# Altium PCB 1st attempt.PcbDoc
Units mil, origin at the board's own origin, x right, y up, seen from the top; angles counter-clockwise.
Board outline 2615 x 1755 mil, 2 copper layers (Top Layer, Bottom Layer); 48 components, 55 nets, 251 pads, 63 vias.
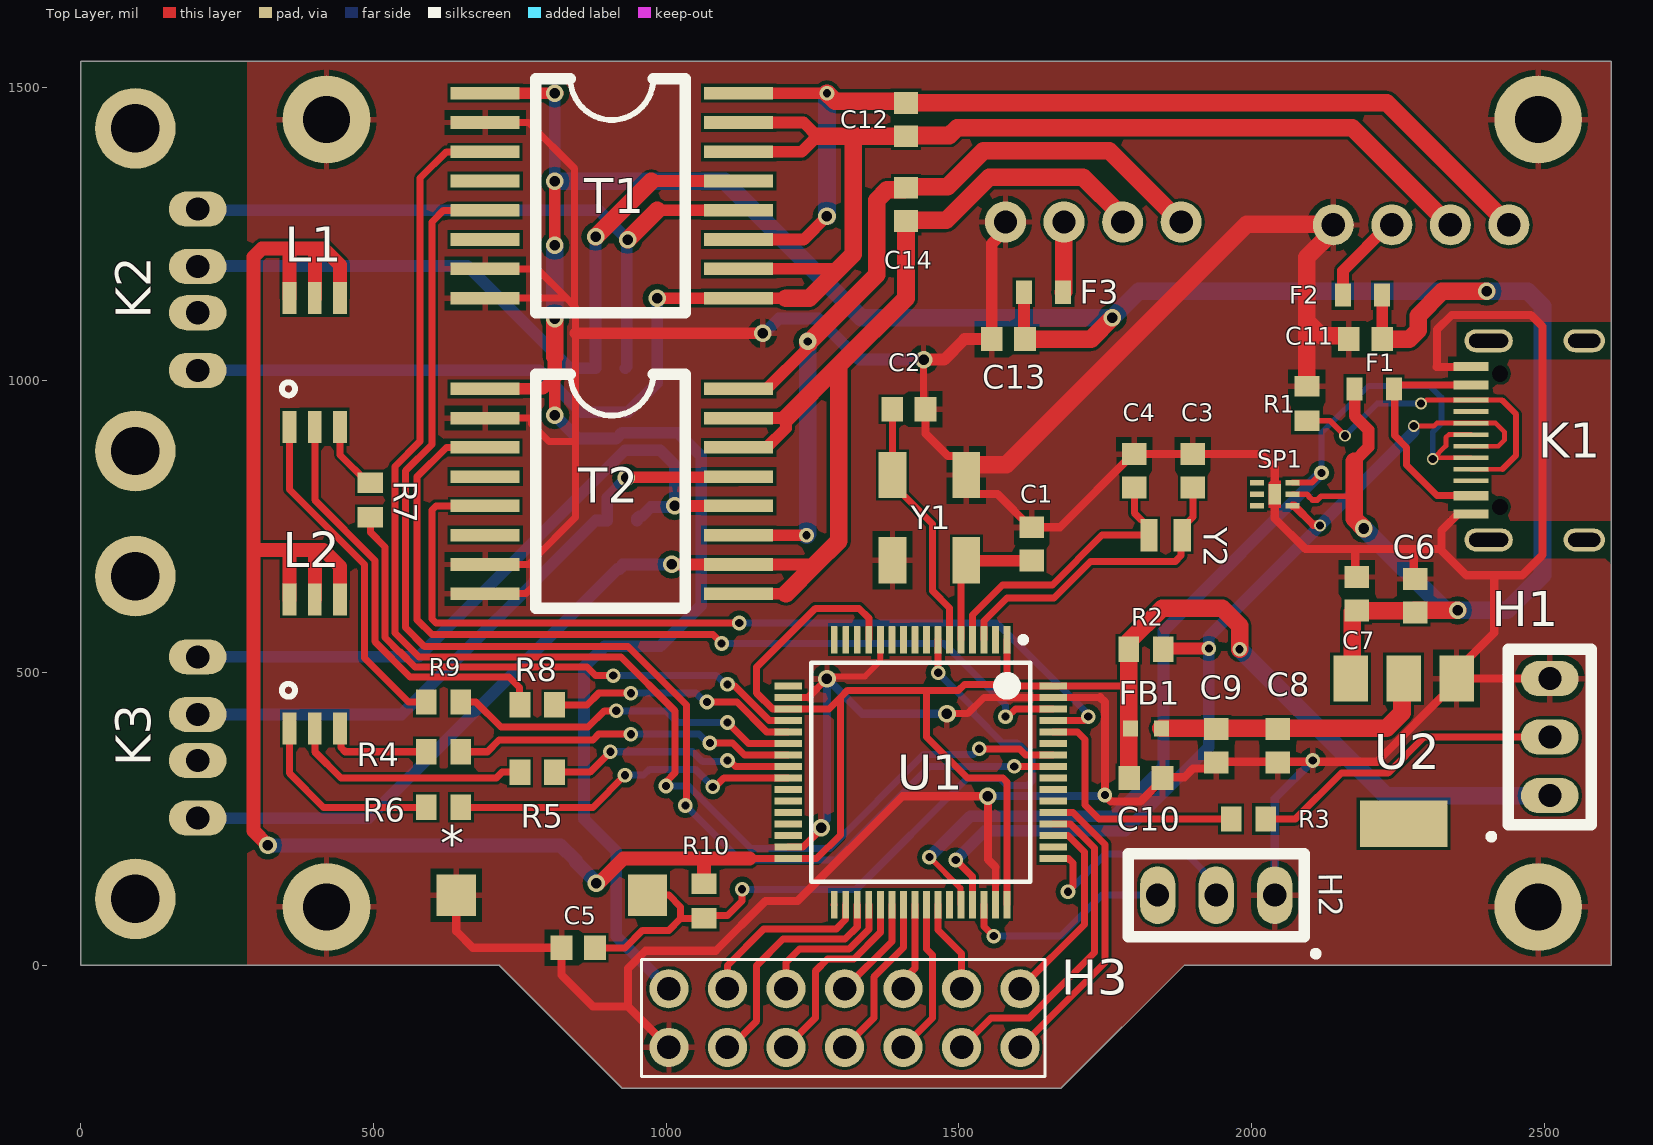
[diagram p0: Top Layer view]
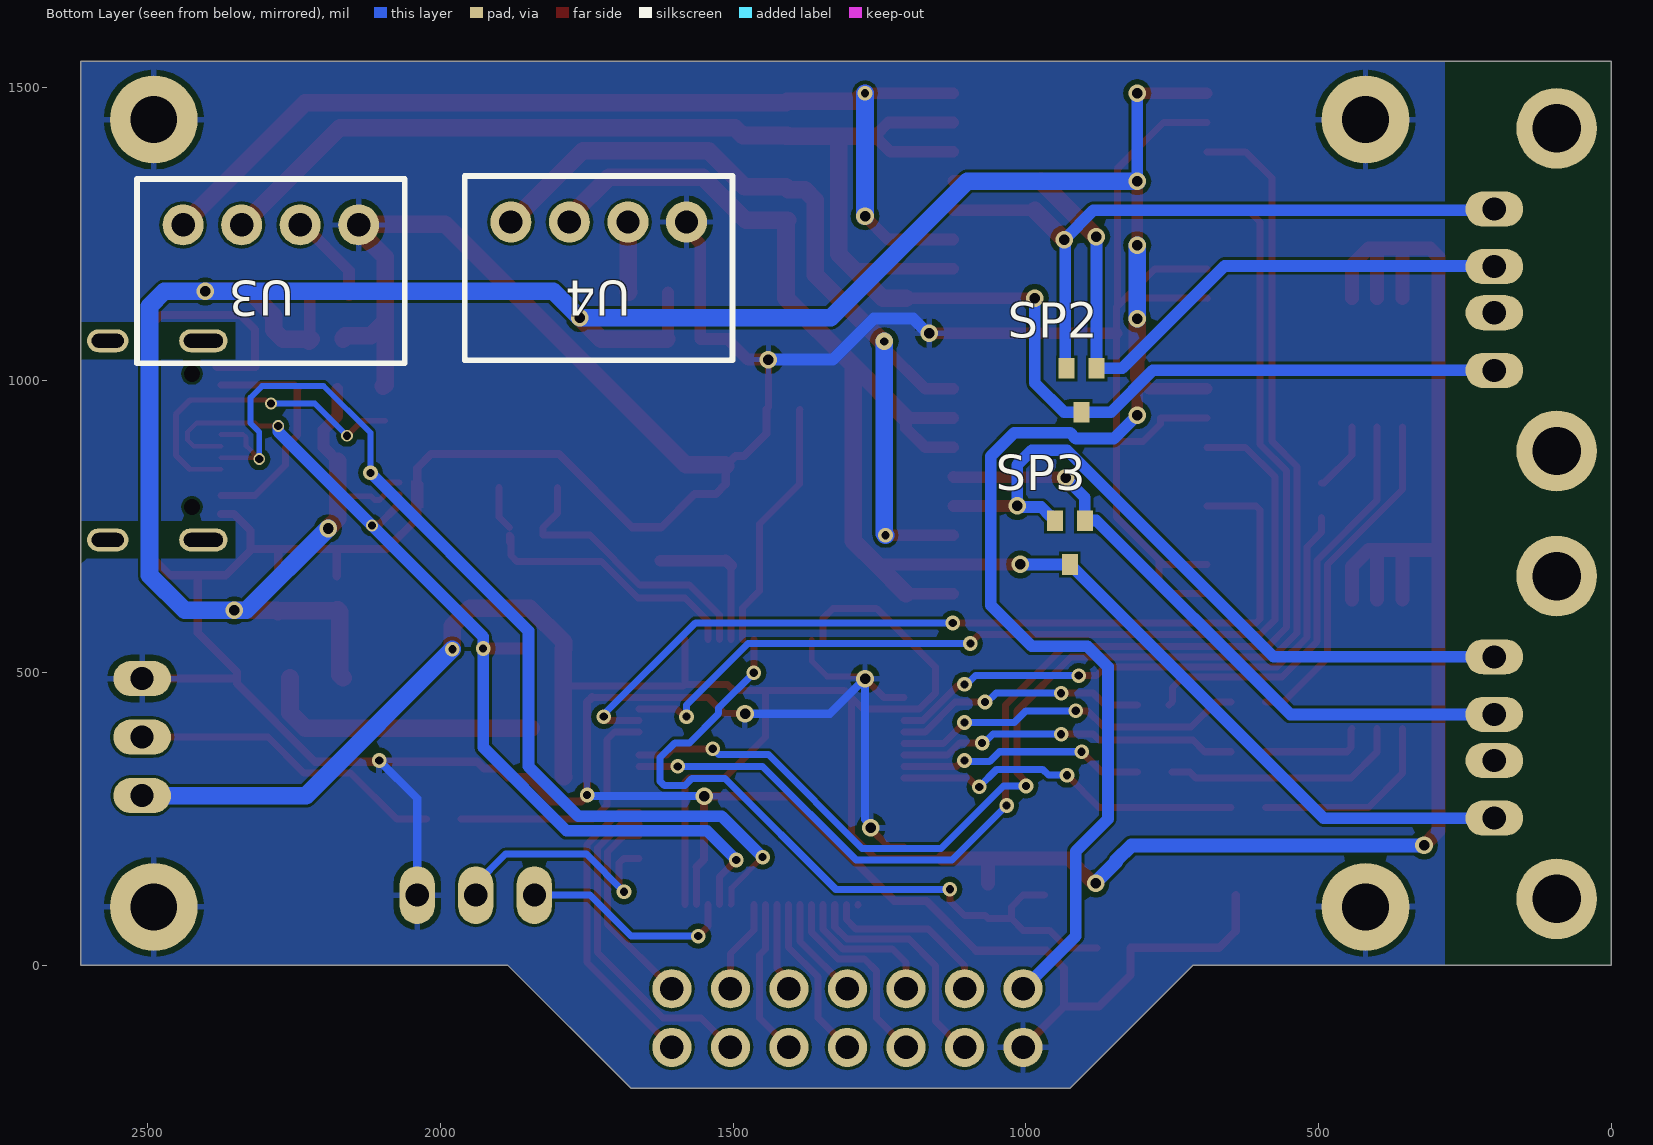
[diagram p1: Bottom Layer view, seen from below]

## Layer stack, top to bottom
Top Solder: solder mask 0.4, Solder Resist, Dk 3.5
Top Layer: signal copper 1.4
Dielectric 1: dielectric 12.6, FR-4, Dk 4.8
Bottom Layer: signal copper 1.4
Bottom Solder: solder mask 0.4, Solder Resist, Dk 3.5

## Board outline
0,0 0,1545 2615,1545 2615,0 1885,0 1675,-210 925,-210 715,0

## Design rules (kind name [scope] priority, off if disabled: settings)
Clearance [All] p1: gap=5 ignorepadtopadclearanceinfootprint=TRUE except(0: Arc-Hole Track-Hole SMDPad-Hole THPad-Hole Via-Hole Fill-Hole Poly-Hole Region-Hole Text-Hole; 9: Arc-Via Arc-Text Track-Via Track-Text SMDPad-Via SMDPad-Text Via-Via Via-Fill Via-Poly Via-Region Via-Text Fill-Fill Fill-Poly Fill-Region Fill-Text Poly-Poly Poly-Region Poly-Text Region-Region Region-Text Text-Text)
PolygonConnect [All] p1: connectstyle=Relief reliefconductorwidth=10 reliefentries=4 polygonreliefangle="90 Angle" airgapwidth=10
RoutingVias [All] p1: holewidth=14 width=30 viastyle="Through Hole" minholewidth=10 minwidth=20 maxholewidth=28 maxwidth=50
SolderMaskExpansion [All] p1: expansion=4 istentingtop=FALSE
Width [All] p1: maxlimit=80 minlimit=6 preferedwidth=12 minimp=50.000000 maximp=50.000000 favimp=50.000000
30 further rules are at their usual default settings.

## Classes and differential pairs
component class "power managment": C6 C7 C8 C9 C10 C11 C12 C13 C14 F1 F2 F3 FB1 K1 R1 R2 SP1 U2 U3 U4
component class MCU: * C1 C2 C3 C4 C5 H1 H2 H3 K2 K3 L1 L2 R3 R4 R5 R6 R7 R8 R9 R10 U1 Y1 Y2
component class "digital logic": SP2 SP3 T1 T2

## Components (designator, comment, footprint, x,y, rotation, side; value= is the part's Value field where it differs from the comment)
* "B1" "Button 3.5x6x4.3mm" 805,120 r270 top
C1 "10pF" CAPC1608X90X35ML10T15 1625,720 r90 top
C2 "10pF" CAPC1608X90X35ML10T15 1415,950 r0 top
C3 "6pF" CAPC1608X90X35ML10T15 1900,845 r270 top
C4 "6pF" CAPC1608X90X35ML10T15 1800,845 r270 top
C5 "100pF" CAPC1608X90X35ML10T15 850,30 r0 top
C6 "10uF" CAPC1608X90X35ML10T15 2280,631.46 r270 top
C7 "100pF" CAPC1608X90X35ML10T15 2180,635 r270 top
C8 "10uF" CAPC1608X90X35ML10T15 2045,375 r90 top
C9 "100pF" CAPC1608X90X35ML10T15 1940,375 r90 top
C10 "100pF" CAPC1608X90X35ML10T15 1820,320 r180 top
C11 "4.7uF" CAPC1608X90X35ML10T15 2195,1070 r180 top
C12 "10uF" CAPC1608X90X35ML10T15 1410,1445 r270 top
C13 "4.7uF" CAPC1608X90X35ML10T15 1585,1070 r180 top
C14 "10uF" CAPC1608X90X35ML10T15 1410,1300 r270 top
F1 "PPTC 0.5A" "PTC 0603" 2210,985 r0 top
F2 "PPTC 0.2A" "PTC 0603" 2190,1145 r180 top
F3 "PPTC 0.2A" "PTC 0603" 1645,1150 r0 top
FB1 "BLM18PG181SN1D" MURA-BLM18PG_KG-CHIP-2_V2 1820,405 r180 top
H1 "Boot0" DIP3 2510,390 r90 top
H2 "SWD" DIP3 1940,120 r180 top
H3 "DIP4*2 Header" DIP7*2 1155,-90 r0 top
K1 "USB C" "USB type C" 2405.31,897 r270 top
K2 "USB A" "USB A" 200,1154.37 r270 top
K3 "USB A" "USB A" 200,389.37 r270 top
L1 "FM-Z3535RGBA-SH" Z3535RGBA 400,1030 r270 top
L2 "FM-Z3535RGBA-SH" Z3535RGBA 400,515 r270 top
R1 "5.1kOm" RESC1608X55X30ML20T10 2095,960 r270 top
R2 "1.5kOm" RESC1608X55X30ML20T10 1820,540 r0 top
R3 "10kOm" RESC1608X55X30ML20T10 1995,250 r0 top
R4 "100Om" RESC1608X55X30ML20T10 620,365 r0 top
R5 "39Om" RESC1608X55X30ML20T10 780,330 r0 top
R6 "62Om" RESC1608X55X30ML20T10 620,270 r0 top
R7 "100Om" RESC1608X55X30ML20T10 495,795 r270 top
R8 "39Om" RESC1608X55X30ML20T10 780,445 r0 top
R9 "62Om" RESC1608X55X30ML20T10 620,450 r0 top
R10 "10kOm" RESC1608X55X30ML20T10 1065,110 r270 top
SP1 "SP3002-04UTG" uDFN-6 2040,805 r0 top
SP2 "SP1001-02JTG" SC70-3 905,1020 r0 bottom
SP3 "SP1001-02JTG" SC70-3 925,759.8 r0 bottom
T1 "TJA1052IT/5Y" TJA1052 905,1315 r0 top
T2 "TJA1052IT/5Y" TJA1052 905,810 r0 top
U1 "STM32F105RBT6" STM-LQFP64_V 1435,330 r270 top
U2 "AMS1117-3.3" AMS1117 2260,490 r180 top
U3 "B0505S-1WR3" "Dip4 package" 2140,1265 r0 bottom
U4 "B0505S-1WR3" "Dip4 package" 1580,1270 r0 bottom
Y1 "8MHz" "SMD-5032 resonator" 1450,765 r90 top
Y2 "32.768KHZ-T" SMD-2012 1853.54,735 r0 top

## Footprints (in the part's own frame and the unit in brackets; to place one, negate y for a bottom-side part, rotate by r counter-clockwise, add the part's x,y. Pads: shape width x height; smd on the part's side, far side on the other; paste and mask are expansions set on the pad)
AMS1117 [mm]
  rect 1.5x2 smd: 1(-2.3,0) 2(0,0) 3(2.3,0)
  rect 3.8x2 smd: ""(0,6.3)
"Button 3.5x6x4.3mm" [mm]
  rect 1.8x1.7 smd: 1(0,-4.15) 2(0,4.15)
CAPC1608X90X35ML10T15 [mm] "Chip Capacitor, 2-Leads, Body 1.60x0.80mm, IPC Low Density"
  rect 0.95x1.05 smd: 1(-0.725,0) 2(0.725,0)
  body extent -0.85,-0.45 0.85,0.45, height 0.9
DIP3 [mm]
  oval 1.524x2.5 hole 1: 1(-2.54,0) 2(0,0) 3(2.54,0)
  silkscreen extent -4.44,-1.8 3.81,2.67
"Dip4 package" [mil]
  round 70 hole 40: 1(0,0) 2(100,0) 3(200,0) 4(300,0)
  silkscreen extent -79,-79 379,236
DIP7*2 [mm]
  round 1.7 hole 1.02: 1(-3.81,1.27) 2(-1.27,1.27) 3(1.27,1.27) 4(3.81,1.27) 5(6.35,1.27) 6(8.89,1.27) 7(11.43,1.27) 8(-3.81,-1.27) 9(-1.27,-1.27) 10(1.27,-1.27) 11(3.81,-1.27) 12(6.35,-1.27) 13(8.89,-1.27) 14(11.43,-1.27)
  silkscreen extent -5,-2.54 12.5,2.54
MURA-BLM18PG_KG-CHIP-2_V2 [mm] "Chip Ferrite Bead, 2-Leads, Body 1.6x0.8mm, Height 0.95mm, Reflow, 0.5 to 1.5A Rated Current"
  rect 0.65x0.7 smd: 1(-0.675,0) 2(0.675,0)
  body extent -0.8,-0.4 0.8,0.4, height 0.95
"PTC 0603" [mm]
  rect 0.7x1 smd: 1(-0.85,0) 2(0.85,0)
RESC1608X55X30ML20T10 [mm] "Chip Resistor, 2-Leads, Body 1.60x0.80mm, IPC Low Density"
  rect 0.9x1.1 smd: 1(-0.75,0) 2(0.75,0)
  body extent -0.9,-0.5 0.9,0.5, height 0.55
SC70-3 [mm]
  rect 0.7x0.9 smd: 1(-0.65,0) 2(0.65,0) 3(0,1.9)
SMD-2012 [mm]
  rect 0.75x1.4 smd: 1(-0.725,0) 2(0.725,0)
"SMD-5032 resonator" [mm]
  rect 2x1.2 smd: 1(1.85,1.6) 2(-1.85,-1.6) GND(-1.85,1.6) GND(1.85,-1.6)
STM-LQFP64_V [mm] "Thin QFP, 64-Leads, Body 10x10mm, Pitch 0.5mm, ST Recommended"
  rect 1.2x0.3 smd: 1(-5.75,3.75) 2(-5.75,3.25) 3(-5.75,2.75) 4(-5.75,2.25) 5(-5.75,1.75) 6(-5.75,1.25) 7(-5.75,0.75) 8(-5.75,0.25) 9(-5.75,-0.25) 10(-5.75,-0.75) 11(-5.75,-1.25) 12(-5.75,-1.75) 13(-5.75,-2.25) 14(-5.75,-2.75) 15(-5.75,-3.25) 16(-5.75,-3.75) 33(5.75,-3.75) 34(5.75,-3.25) 35(5.75,-2.75) 36(5.75,-2.25) 37(5.75,-1.75) 38(5.75,-1.25) 39(5.75,-0.75) 40(5.75,-0.25) 41(5.75,0.25) 42(5.75,0.75) 43(5.75,1.25) 44(5.75,1.75) 45(5.75,2.25) 46(5.75,2.75) 47(5.75,3.25) 48(5.75,3.75)
  rect 0.3x1.2 smd: 17(-3.75,-5.75) 18(-3.25,-5.75) 19(-2.75,-5.75) 20(-2.25,-5.75) 21(-1.75,-5.75) 22(-1.25,-5.75) 23(-0.75,-5.75) 24(-0.25,-5.75) 25(0.25,-5.75) 26(0.75,-5.75) 27(1.25,-5.75) 28(1.75,-5.75) 29(2.25,-5.75) 30(2.75,-5.75) 31(3.25,-5.75) 32(3.75,-5.75) 49(3.75,5.75) 50(3.25,5.75) 51(2.75,5.75) 52(2.25,5.75) 53(1.75,5.75) 54(1.25,5.75) 55(0.75,5.75) 56(0.25,5.75) 57(-0.25,5.75) 58(-0.75,5.75) 59(-1.25,5.75) 60(-1.75,5.75) 61(-2.25,5.75) 62(-2.75,5.75) 63(-3.25,5.75) 64(-3.75,5.75)
  silkscreen extent -5.87,-4.75 4.75,4.75, body extent -5,-5 5,5, height 1.6
TJA1052 [mm]
  rect 3x0.55 smd: CANH(5.563,0.635) CANL(5.563,-0.635) GND1(-5.436,-4.445) GND1(-5.436,-3.175) GND1(-5.436,3.175) GND2(5.563,-4.445) GND2(5.563,-3.175) GND2(5.563,3.175) RXD(-5.436,-0.635) STB(5.563,1.905) TXD(-5.436,1.905) Vdd1(-5.436,4.445) Vdd2(5.563,-1.905) Vdd2(5.563,4.445) ""(-5.436,-1.905) ""(-5.436,0.635)
  silkscreen extent -3.24,-5.08 3.24,5.08
uDFN-6 [mm]
  rect 0.6x0.25 smd mask+0.05: 1(-0.774,0.5) 2(-0.774,0) 3(-0.774,-0.5) 4(0.774,0.5) 5(0.774,0) 6(0.774,-0.5)
  rect 0.525x0.9 smd paste+0 mask+0.102: GND(0,0)
  Top Layer pour cut-out: 0.127,0.635
  Top Layer region: -0.262,-0.587 -0.262,0.487 -0.172,0.587 0.262,0.587 0.262,-0.587
  Top Layer keep-out region: 1.651,0
"USB A" [mm]
  oval 1.524x2.5 hole 1: 1(-3.5,0) 2(-1,0) 3(1,0) 4(3.5,0)
  round 3.5 hole 2.1: ""(-7,-2.71) ""(7,-2.71)
"USB type C" [mm]
  rect 0.2x1.524 smd: A5(1.25,-0.762) A6(0.25,-0.762) A7(-0.25,-0.762) A8(-1.25,-0.762) B5(-1.75,-0.762) B6(-0.75,-0.762) B7(0.75,-0.762) B8(1.75,-0.762)
  rect 0.4x1.524 smd: GND(-3.2,-0.762) GND(3.2,-0.762) Vbus(-2.4,-0.762) Vbus(2.4,-0.762)
  oval 1x1.8 hole 1.4 slot 0.6 at 0 deg: ""(-4.32,4.15)
  oval 1x2.1 hole 1.7 slot 0.6 at 0 deg: ""(-4.32,0) ""(4.32,0)
  round 0 hole 0.7 unplated: ""(-2.89,0.5) ""(2.89,0.5)
  oval 1x1.8 hole 1.4 slot 0.6 at 0 deg unplated: ""(4.32,4.15)
Z3535RGBA [mm]
  rect 1.4x0.6 smd: B+(-2.8,-1.1) B-(2.8,-1.1) G+(-2.8,0) G-(2.8,0) R+(-2.8,1.1) R-(2.8,1.1)
  silkscreen extent 0.86,-1.43 1.43,-0.86

## Part data
*: library part Button
C1 C2 C3 C4 C5 C6 C7 C8 C9 C10 C11 C12 C13 C14: library part CMP-2006-02335-1, Manufacturer=Murata, Part Number=GCM1885C2A101JA16D
F1 F2 F3: library part "PTC Resettable Fuse"
FB1: library part CMP-0686-00566-2, "Chip Ferrite Bead for Power Lines, 180 Ohm, 1500 mA, -55 to 125 degC, 1.6 x 0.8 x 0.95 mm SMD, Tape and Reel", DC Resistance="0.09 Ohm Max.", Manufacturer=Murata, Operating Temperature Range="-55 to 125 degC", Rated Current="1500 mA", ComponentLink1Description="Manufacturer URL", ComponentLink1URL=http://www.murata.com/, ComponentLink2Description=Datasheet, ComponentLink2URL=http://www.murata.com/products/catalog/pdf/c31e.pdf, ComponentLink3Description="Package Specification", ComponentLink3URL=http://www.murata.com/products/catalog/pdf/c31e.pdf, DatasheetVersion=08/2013, Impedance (at 100 MHz)="180 Ohm +/- 25%", Mounting Technology="Surface Mount", PackageDescription="2-Pin Chip, Body 1.6 x 0.8 mm", PackageReference=BLM18_H950-2, Packing="Tape and Reel", PartNumber=BLM18PG181SN1D
H1 H2: library part "DIP3 header"
R1 R2 R3 R4 R5 R6 R7 R8 R9 R10: library part CMP-2000-01555-1, Manufacturer="KOA Speer", Part Number=RK73H1JTTD5101F
U1: library part CMP-0237-00224-3, "ARM Cortex-M3 32-bit MCU, 128 KB Flash, 64 KB Internal RAM, 51 I/Os, 64-pin LQFP, -40 to 85 degC, Tray", I/Os (High Current)=51, Operating Frequency(F) (Processor speed) (MHz)=72, Supply Voltage(Vcc) min (V)=2, A/D Converter="2x12-bit (16 Channel)", ComponentLink1Description="Manufacturer URL", ComponentLink1URL=http://www.st.com/web/en/home.html, ComponentLink2Description=Datasheet, ComponentLink2URL=http://www.st.com/st-web-ui/static/active/en/resource/technical/document/datasheet/CD00220364.pdf, ComponentLink3Description="Package Specification", ComponentLink3URL=http://www.st.com/st-web-ui/static/active/en/resource/technical/document/datasheet/DM00037051.pdf, Core="ARM Cortex-M3", D/A Converter="2x12-bit (2 Channel)", DatasheetVersion="Rev. 6", FLASH Size (Prog) (kB)=128, Internal RAM Size (kB)=64, Mounting Technology="Surface Mount", PackageDescription="64-Pin Low Profile Quad Flat Package, 10 x 10 mm Body, 0.5 mm Pitch", PackageReference=LQFP64, PackageVersion="Rev. 4, 06/2013", Packing=Tray, PartNumber=STM32F105RBT6
Y1: library part "TXC Corp 7B08070003 resonator"
Y2: library part "Abracon LLC ABS06-107-32.768KHZ-T", ComponentLink1Description="New link", ComponentLink1URL=https://lcsc.com/product-detail/SMD-Crystal-Resonators_Abracon-LLC_ABS06-107-32-768KHZ-T_Abracon-LLC-ABS06-107-32-768KHZ-T_C276418.html
L1 L2: ComponentLink1Description="New link", ComponentLink1URL=https://lcsc.com/product-detail/Light-Emitting-Diodes-LED_SMDLED-120-480mcd_C110903.html
SP1: ComponentLink1Description="New link", ComponentLink1URL=https://lcsc.com/product-detail/Others_Littelfuse_SP3002-04UTG_Littelfuse-SP3002-04UTG_C207277.html
T1 T2: ComponentLink1Description="New link", ComponentLink1URL=https://lcsc.com/product-detail/CAN-ICs_NXP-Semicon_TJA1052IT-5Y_NXP-Semicon-TJA1052IT-5Y_C92210.html
U3 U4: ComponentLink1Description="New link", ComponentLink1URL=https://lcsc.com/product-detail/Power-Modules_B0505S-1WR3_C131038.html

## Free pads (board coordinates)
  round 150 hole 80: 6(420,100) 7(420,1445) 8(2490,100) 9(2490,1445)

## Via types
v1: diameter 25, hole 14, Top Layer to Bottom Layer, 33 vias
v2: diameter 30, hole 18, Top Layer to Bottom Layer, 24 vias
v3: diameter 20, hole 14, Top Layer to Bottom Layer, 5 vias
v4: diameter 30, hole 14, Top Layer to Bottom Layer, 1 vias

## Nets (pads, with @x,y where several pads share a name; then routed paths per layer and width w, separated by ;. In a path a pad name is that pad's centre, name@x,y a point inside that pad or via, vN(x,y) a via of type N, cw(c..) or ccw(c..) an arc to the next point about the centre after c; other vN are vias at no path point)
GND: *.1 C1.2 C2.2 C3.1 C4.1 C5.1 C6.1 C7.1 C8.1 C9.1 C10.1 C11.2 C13.2 H1.3 H2.1 H3.8 K1.GND pad.6 pad.7 pad.8 pad.9 R1.1 SP1.GND T1.GND1 T2.GND1 U1.12 U1.18 U1.31 U1.47 U1.63 U2.1 U3.1 U4.1 Y1.GND | length 10367.5
  Top Layer w10: v2(1275,490) 1278.64,493.64 1339.74,493.64 1366.1,520 U1.12
  Top Layer w12: T1.GND1@690,1139.04 690.96,1140 830,1140 ; T2.GND1@690.96,635 760,635 772.5,647.5 772.5,692.5 ; T2.GND1@690.96,685 765,685 772.5,692.5 ; T2.GND1@690.96,935 770,935 770,925 800,895 845,895 ; T1.GND1@690.96,1190 780,1190 830,1140 ; T1.GND1@690.96,1440 765,1440 844,1361 844,1126 ; U1.31 1208.72,202.14 1234.12,202.14 1263.59,231.61 v2@1265,231.61 ; U1.18 1208.72,458.05 1243.05,458.05 v2(1275,490) ; v2(1440,1035) 1440,953.54 C2.2 ; v2(1480,430) 1515,430 1542.95,457.95 U1.63 1741.8,457.95 ; U1.47 1562.95,167.72 ; 772.5,692.5 845,765 845,895 ; 830,1140 844,1126 ; 844,1126 845,1125 845,1080 845,895
  Top Layer w14: *.1 641.61,58.39 670,30 C5.1 821.46,-16.46 875,-70 935,-70 ; H3.8 935,-70 ; v2@1265,231.61 v2(1265,235) ; C2.2 1443.54,908.33 1481.67,870.2 1496.37,870.2 1512.99,853.58 1512.99,837.83 1512.99,822.09 1529.61,805.46 1566.11,805.46 1623.03,748.54 C1.2 1673.03,748.54 1798.03,873.54 C4.1 C3.1 2016.46,873.54 2040,850 SP1.GND 2040,763.78 2092.4,711.38 2177.4,711.38 ; 1562.95,167.72 1550,180.67 v2(1550,289) 1404,289 1225,110 1170,110 1085,25 965,25 935,-5 935,-70 ; 1741.8,457.95 1750,449.75 1750,291.25 v1(1749.82,291.07) ; v1@1750,290 1760,280 1810.51,280 1848.54,318.03 C10.1 ; C10.1@1848.54,321.38 1885.65,321.38 1900.4,336.13 1925.7,336.13 1937.4,347.83 2214.25,347.83 2347.95,481.54 2347.95,501.22 2414.9,568.17 2414.9,666.38 ; C7.1@2177.4,664.92 2177.4,711.38 ; C6.1@2277.4,661.38 2277.4,711.38 ; U2.1 H1.3 ; K1.GND@2375.31,771.02 2353.19,771.02 2325,742.83 2325,713.98 2322.4,711.38 ; K1.GND@2382.4,1022.36 2316.42,1022.36 2317.4,1023.35 2317.4,1086.38 2342.4,1111.38 2477.4,1111.38 2497.4,1091.38 2497.4,701.38 2462.4,666.38 2414.9,666.38 ; 2177.4,711.38 2277.4,711.38 ; 2277.4,711.38 2322.4,711.38 ; 2322.4,711.38 2367.4,666.38 2414.9,666.38
  Top Layer w20: 845,1080 v2(1165,1080) ; v2(1440,1035) 1475,1035 1510,1070 C13.2 1556.46,1232.93 1577.4,1253.87 U4.1@1577.4,1260.55
  Top Layer w30: Y1.GND@1512.99,853.58 1515,855.59 1581.61,855.59 1992.4,1266.38 2138.62,1266.38 2138.62,1253.62 2095,1210 2095,1100 ; R1.1@2097.72,989.53 2095,992.24 2095,1100 ; C11.2 2166.46,1071.97 2162.76,1075.67 2119.33,1075.67 2105.01,1089.99 2095,1100
  Bottom Layer w14: 1275,249.33 v2(1275,490) 1335,430 v2(1480,430) ; v2(1550,289) 1550.5,289.5 1748.25,289.5 v1(1749.82,291.07) ; H2.1 2040,285 v1(2105,350)
  Bottom Layer w20: v2(1165,1080) 1167.71,1080 1192.71,1105 1260,1105 1330,1035 v2(1440,1035)
Net*_2: *.2 C5.2 R10.2 U1.7 | length 1293.4
  Top Layer w12: C5.2 930,30 960,60 1005,60 1025,80 ; *.2 1005,120 1025,100 1025,80 ; v1(1130,130) 1130,110 1105,85 1069.53,85 R10.2 1064.53,80 1025,80 ; U1.7 1464.62,556.28 1464.62,500.38 v1(1465,500)
  Bottom Layer w12: v1(1130,130) 1325,130 1514,319 1571,319 1582.5,307.5 1617.97,307.5 1625,314.53 1625,355 1600,380 1575,380 1525,430 1525,440 v1(1465,500)
NetC1_1: C1.1 U1.5 Y1.2 | length 251.9
  Top Layer w12: U1.5 Y1.2@1503.9,683.07
  Top Layer w20: Y1.2@1503.9,683.07 Y1.2 1513.7,691.46 C1.1
NetC2_1: C2.1 U1.6 Y1.1 | length 434.1
  Top Layer w12: C2.1 1387.01,949.45 Y1.1 1387.01,822.09 1455,754.09 1455,640 1484.21,610.79 U1.6
NetC3_2: C3.2 U1.3 Y2.2 | length 539.6
  Top Layer w12: U1.3 1543.36,556.47 1543.36,588.36 1582.39,627.39 1662.84,627.39 1725.46,690 1870,690 1880,700 1880,732.91 Y2.2 Y2.2@1882.09,722.2 ; Y2.2@1882.09,747.8 1900,765.71 C3.2
NetC4_2: C4.2 U1.4 Y2.1 | length 491.9
  Top Layer w12: U1.4 1523.58,598.58 1575,650 1660,650 1745,735 Y2.1 1825,747.8 1800,772.8 C4.2
NetC6_2: C6.2 C7.2 C11.1 C13.1 F1.1 F2.1 F3.1 H3.1 SP1.5 T1.Vdd1 T2.Vdd1 U2.3 | length 6087.1
  Top Layer w6: C13.1@1611.54,1072.01 C13.1
  Top Layer w10: SP1.5 2094.8,805 2098.5,801.3 2098.5,800.86 2104.36,795 2112.65,795 2119.02,801.38 2175.91,801.38
  Top Layer w20: T2.Vdd1 790,985 810,1005 v2(810,940) ; T1.Vdd1 v2(810,1490) v2@815,1490 ; v2(810,1230) v2(810,1340) ; C13.1@1611.54,1072.01 F3.1 ; 2175.91,860.91 2200,885 2200,915 2176.54,938.46 F1.1 ; F2.1 F2.1 C11.1 C11.1
  Top Layer w25: 810,1005 810,1040
  Top Layer w30: 810,1040 v2(810,1105) ; C13.1 1726.02,1070 v2(1762.4,1106.38) ; U2.3@2166.85,491.38 2172.13,496.65 2172.13,604.13 2175.83,607.83 2177.4,607.83 2179.17,606.06 2275.63,606.06 2277.4,604.29 2279.49,606.38 v2(2352.4,606.38) ; 2175.91,860.91 2175.91,801.38 2175.91,762.87 v2(2192.4,746.38) ; C11.1@2220.94,1070.08 C11.1@2224.65,1066.38 ; C11.1 2270,1070 2285,1085 2285,1110 2326.38,1151.38 v2(2402.4,1151.38)
  Bottom Layer w20: v2(810,940) 850,900 914.64,900 924.64,910 1020,910 1060,870 1060,615 990,545 895,545 860,510 860,250 915,195 915,50 H3.1 ; v2(810,1340) v2(810,1490)
  Bottom Layer w30: v2(810,1105) v2(810,1230) ; v2(810,1340) 1100,1340 1333.62,1106.38 v2(1762.4,1106.38) 1807.4,1151.38 v2(2402.4,1151.38) 2472.4,1151.38 2497.4,1126.38 2497.4,666.38 2437.4,606.38 v2(2352.4,606.38) 2332.4,606.38 v2(2192.4,746.38)
NetC8_2: C8.2 C9.2 FB1.1 U2.2 | length 482.9
  Top Layer w30: FB1.1@1845.43,404.92 1937.4,404.92 2042.4,404.92 2230.94,404.92 2257.4,431.38 U2.2@2257.4,491.38
NetC10_2: C10.2 FB1.2 H1.1 L1.B+ L1.G+ L1.R+ L2.B+ L2.G+ L2.R+ R2.1 R10.1 U1.1 U1.13 U1.19 U1.32 U1.48 U1.64 | length 5773.3
  Top Layer w12: 1142.36,182.36 U1.32 1257.36,182.36 1297.95,222.95 1297.95,457.95 ; U1.13 1346.42,593.58 1330,610 1255,610 1155,510 1155,465 1181.64,438.36 1208.53,438.36 U1.19 1278.27,438.27 1297.95,457.95 ; U1.48 1582.64,312.97 1575.61,320 1515,320 1445,390 1445,470 ; U1.1 1582.64,480 ; C10.2@1789.47,321.99 C10.2 ; 1790.83,475 1788.19,477.64 U1.64 1585,477.64 1582.64,480 ; 1297.95,457.95 1310,470 1445,470 ; 1445,470 1500,470 1510,480 1582.64,480
  Top Layer w24: v2(320,205) 295,230 295,710 ; L2.B+ 356.69,708.31 355,710 ; L1.B+ 356.69,1223.31 355,1225 ; L2.G+ 400,705 395,710 ; L1.G+ 400,1225 ; L2.R+ 443.31,681.69 415,710 395,710 ; L1.R+ 443.31,1196.69 415,1225 400,1225 ; v2@880.5,139.5 v2(881,140) 885,140 927.36,182.36 1065,182.36 ; R10.1 1065,182.36 ; 1142.36,182.36 1065,182.36 ; 295,710 355,710 ; 295,710 295,1210 310,1225 355,1225 ; 355,710 395,710 ; 355,1225 400,1225
  Top Layer w30: C10.2@1789.47,321.99 1790.83,323.35 1790.83,475 R2.1@1790.83,538.86 ; R2.1 1790,540.47 1790,552.57 1847.43,610 1950,610 1980,580 v1(1980,540)
  Bottom Layer w24: v2(320,205) 820,205 845.91,179.09 845.91,176.71 881,141.62 v2(881,140)
  Bottom Layer w30: v1(1980,540) 2230,290 H1.1
NetC12_1: C12.1 T1.Vdd2 U3.4 | length 1786.7
  Top Layer w20: T1.Vdd2@1124.04,1240 1235,1240 v2(1275,1280) ; T1.Vdd2@1124.04,1490 v1(1275,1490)
  Top Layer w30: v1(1275,1490) 1289,1476 1407.54,1476 C12.1 2231.46,1473.54 U3.4
  Bottom Layer w30: v2(1275,1280) v1(1275,1490)
NetC12_2: C12.2 K2.4 SP2.3 T1.GND2 T1.STB U3.3 | length 3164
  Top Layer w20: v2(985,1140) 1124.04,1140 1205,1140 ; T1.GND2@1124.04,1190 1295,1190 ; T1.STB 1232.09,1390 1258.54,1416.46 1235,1440 T1.GND2@1124.04,1440
  Top Layer w30: 1205,1140 1245,1140 1295,1190 1320,1215 1320,1416.46 ; 1258.54,1416.46 1320,1416.46 ; C12.2@1407.4,1417.83 1484.11,1417.83 1497.66,1431.38 2172.4,1431.38 U3.3@2337.4,1266.38 ; C12.2 1320,1416.46
  Bottom Layer w20: K2.4 783.43,1016.57 854.8,945.2 SP2.3 905.2,945 935,945 985,995 v2(985,1140)
NetC14_1: C14.1 T2.Vdd2 U4.4 | length 1502
  Top Layer w20: T2.Vdd2@1124.04,735 v1(1240,735) ; T2.Vdd2@1124.04,985 1172.26,985 1240.26,1052.99 1240.26,1061.34 v4@1242.04,1063.12
  Top Layer w30: v4@1242.04,1063.12 v4@1242.17,1063.12 ; v4(1242.17,1065.95) v4@1242.17,1063.12 ; C14.1 1406.3,1324.84 1377.57,1324.84 1360,1307.27 1360,1180 1245,1065 1245,1063.12 v4@1242.17,1063.12 ; C14.1@1410,1329.92 1480.94,1329.92 1542.4,1391.38 1757.4,1391.38 U4.4@1877.4,1271.38
  Bottom Layer w30: v1(1240,735) 1242.17,737.17 v4(1242.17,1065.95)
NetC14_2: C14.2 K3.4 SP3.3 T2.GND2 T2.STB U4.3 | length 2796.6
  Top Layer w20: v2(1010,685) 1124.04,685 1255,685 ; T2.GND2@1124.04,635 1205,635 ; T2.STB 1172.26,885 1205,917.74 1205,935 T2.GND2@1124.04,935
  Top Layer w30: 1205,635 1255,685 1295,725 1295,1025 ; 1205,935 1295,1025 ; C14.2@1407.4,1272.83 1478.86,1272.83 1552.4,1346.38 1712.4,1346.38 1777.4,1281.38 U4.3@1777.4,1271.38 ; C14.2 1410,1140 1295,1025
  Bottom Layer w20: K3.4 491.57,251.57 917.28,677.28 921.22,677.28 925,681.06 SP3.3 v2(1010,685)
NetF1_2: F1.2 K1.Vbus | length 405.5
  Top Layer w12: K1.Vbus@2375.31,802.51 2317.49,802.51 2265,855 2265,885 2245,905 2245,983.46 F1.2 2249.95,991.49 K1.Vbus@2375.31,991.49
NetF2_2: F2.2 U3.2 | length 163.1
  Top Layer w20: F2.2 2156.54,1186.54 U3.2@2235,1265
  Top Layer w30: U3.2@2235,1265 U3.2 U3.2@2240,1259.37
NetF3_2: F3.2 U4.2 | length 123.8
  Top Layer w30: F3.2 1679.23,1150.77 1679.23,1269.23 U4.2 U4.2@1682.24,1267.76
NetH1_2: H1.2 R3.2 | length 543.5
  Top Layer w12: R3.2 2075,250 2153.83,328.83 2233.83,328.83 2295,390 H1.2
NetH2_2: H2.2 U1.49 | length 396.9
  Top Layer w12: U1.49@1661.47,182.46 U1.49 1661.47,182.27 1687.73,182.27 1695,175 v1@1695,135
  Bottom Layer w12: v1(1686.8,125.7) 1751.11,190 1889.21,190 1940,139.21 H2.2
NetH2_3: H2.3 U1.46 | length 369.5
  Top Layer w12: U1.46 1543.27,66.73 v1(1560,50)
  Bottom Layer w12: v1(1560,50) 1675,50 1745,120 H2.3
NetH3_2: H3.2 U1.34 | length 299.8
  Top Layer w12: H3.2 1105,0 1167,62 1290.82,62 1306.95,78.13 1306.95,103.53 U1.34
NetH3_3: H3.3 U1.36 | length 252
  Top Layer w12: H3.3 1205,5 1228,28 1313,28 1346.42,61.42 U1.36
NetH3_4: H3.4 U1.38 | length 177.1
  Top Layer w12: H3.4 1385.79,40.79 U1.38
NetH3_5: H3.5 U1.40 | length 152
  Top Layer w12: H3.5 1405,-25.14 1425.16,-4.98 U1.40
NetH3_6: H3.6 U1.42 | length 160.4
  Top Layer w12: U1.42 1464.53,60.47 1505,20 H3.6
NetH3_7: H3.7 U1.51 | length 344.4
  Top Layer w12: H3.7 1715,70 1715,193.51 1686.87,221.64 1661.47,221.64 U1.51
NetH3_9: H3.9 U1.35 | length 400.5
  Top Layer w12: H3.9 1110,-140 1155,-95 1155,0 1200,45 1305.96,45 1326.73,65.77 U1.35
NetH3_10: H3.10 U1.37 | length 336.7
  Top Layer w12: H3.10 1255,-90 1255,-10 1276,11 1321,11 1366.1,56.1 U1.37
NetH3_11: H3.11 U1.39 | length 285.2
  Top Layer w12: H3.11 1355,-90 1355,-20 1405.47,30.47 U1.39
NetH3_12: H3.12 U1.41 | length 268.5
  Top Layer w12: H3.12 1455,-90 1455,17.92 1444.84,28.08 U1.41
NetH3_13: H3.13 U1.52 | length 560.2
  Top Layer w12: H3.13 1555,-90 1620,-90 1732,22 1732,200.55 1691.23,241.32 1661.47,241.32 U1.52
NetH3_14: H3.14 U1.53 | length 517.9
  Top Layer w12: H3.14 1750,5 1750,206.59 1695.58,261.01 1661.47,261.01 U1.53
NetK1_A5: K1.A5 K1.B5 R1.2 | length 560.2
  Top Layer w8: v3(2290,960) 2293.25,960 2299.14,965.9 K1.B5 2427.88,965.9 2428.5,965.28 ; K1.A5 2428.81,847.79
  Top Layer w10: R1.2 2134.53,930.47 v3(2160,905) ; 2428.5,965.28 2452.4,941.38 2452.4,871.38 2428.81,847.79
  Bottom Layer w10: v3(2160,905) 2215,960 v3(2290,960)
NetK1_A6: K1.A6 K1.B6 R2.2 SP1.6 U1.45 | length 1668.8
  Top Layer w8: v3(2277.4,921.38) 2311.38,921.38 2316.53,926.53 K1.B6 2417.24,926.53 2432.4,911.37 2432.4,897.4 2422.16,887.16 K1.A6
  Top Layer w12: v1(1495,180) 1523.58,151.42 U1.45
  Top Layer w14: SP1.6 2073.22,785.32 2105.78,752.76 2116.25,752.76 v3(2117.4,751.61)
  Top Layer w20: R2.2@1852.4,541.38 v1(1927.4,541.38)
  Bottom Layer w20: v1(1495,180) 1545,230 1785,230 1927.4,372.4 v1(1927.4,541.38) 1927.4,561.61 v3(2117.4,751.61) 2277.4,911.61 v3(2277.4,921.38)
NetK1_A7: K1.A7 K1.B7 SP1.4 U1.44 | length 1821.3
  Top Layer w8: K1.B7 2315.72,867.47 2313.25,865 v3(2310,865) 2332.4,887.4 2332.4,902.16 2337.09,906.84 K1.A7
  Top Layer w10: v1(1450,185) 1502.99,132.01 1502.99,104.53 U1.44 ; SP1.4 2103.19,824.68 v1(2119.88,841.38)
  Bottom Layer w10: v1(2119.88,841.38) 2120,841.5 2120,910 2200,990 2305,990 2325,970 2325,926.35 2310,911.35 v3(2310,865)
  Bottom Layer w20: v1(1450,185) 1520,255 1765,255 1850,340 1850,571.5 v1(2119.88,841.38)
NetK2_1: K2.1 SP2.2 T1.CANL | length 1188.2
  Top Layer w20: 985,1290 T1.CANL
  Top Layer w30: v2(935,1240) 985,1290
  Bottom Layer w20: K2.1 202.17,1290 885,1290 v2(935,1240) 933.09,1238.09 933.09,1022.5 SP2.2
NetK2_2: K2.2 SP2.1 T1.CANH | length 1261
  Top Layer w20: 975,1340 T1.CANH
  Top Layer w30: v2(880,1245) 975,1340
  Bottom Layer w20: K2.2 201.26,1195 660.63,1195 835.63,1020 SP2.1 879.7,1020.3 879.7,1244.7 v2(880,1245)
NetK3_1: K3.1 SP3.2 T2.CANL | length 1227.7
  Top Layer w20: v2(1015,785) T2.CANL
  Bottom Layer w20: K3.1 577.17,527.17 930,880 990,880 1015,855 v2(1015,785) 1013.09,783.09 973.87,783.09 958.31,767.52 954.37,767.52 950.59,763.74 SP3.2
NetK3_2: K3.2 SP3.1 T2.CANH | length 1116
  Top Layer w20: v2(932.25,832.75) 933.67,834.17 1123.21,834.17 T2.CANH
  Bottom Layer w20: K3.2 548.74,428.74 880,760 899.21,760 SP3.1 899.41,799.41 932.25,832.25 v2(932.25,832.75)
NetL1_B-: L1.B- R9.1 | length 584.4
  Top Layer w12: L1.B- 356.69,813.31 485,685 485,525 560,450 R9.1
NetL1_G-: L1.G- R8.1 | length 721
  Top Layer w12: L1.G- 400,795 503,692 503,552.96 562.96,493 732,493 750,475 750,450.47 R8.1@755.47,445
NetL1_R-: L1.R- R7.1 | length 119
  Top Layer w12: L1.R- 443.31,872.28 491.06,824.53 R7.1
NetL2_B-: L2.B- R6.1 | length 334.4
  Top Layer w12: L2.B- 356.69,328.31 415,270 R6.1
NetL2_G-: L2.G- R5.1 | length 413
  Top Layer w12: L2.G- 400,365 445,320 710,320 720,330 R5.1
NetL2_R-: L2.R- R4.1 | length 181.8
  Top Layer w12: L2.R- 445,403.07 445,372.03 452.03,365 R4.1
NetR3_1: R3.1 U1.60 | length 431.3
  Top Layer w12: U1.60 1703,398.9 1716,385.9 1716,274 1740,250 R3.1
NetR4_2: R4.2 U1.23 | length 588.3
  Top Layer w12: R4.2 695,365 715,385 875,385 885,395 935.03,395 937.51,397.49 v1(940,395) ; v1(1075,380) 1113.89,380 1134.36,359.53 U1.23
  Bottom Layer w12: v1(940,395) 1056.48,395 1071.48,380 v1(1075,380)
NetR5_2: R5.2 U1.24 | length 424.6
  Top Layer w12: R5.2 870,330 v1(905,365) ; v1(1105,350) 1108.52,350 1118.68,339.84 U1.24
  Bottom Layer w12: v1(905,365) 1045.46,365 1061.96,348.5 v1@1105,348.5
NetR6_2: R6.2 U1.25 | length 604.7
  Top Layer w12: R6.2 875,270 v1(930,325) ; v1(1080,305) 1083.52,305 1098.68,320.16 U1.25
  Bottom Layer w12: v1(930,325) 961.76,325 971.76,335 1050,335 v1(1080,305)
NetR7_2: R7.2 U1.20 | length 964.7
  Top Layer w12: R7.2 495,740 520,715 520,560 545,535 545.96,535 570.96,510 865,510 879.5,495.5 905.53,495.5 907.51,497.49 v1(910,495) ; v1(1105,480) 1107.49,477.51 1117.49,477.51 1176.32,418.68 1208.53,418.68 U1.20
  Bottom Layer w12: v1(910,495) 1086.48,495 1101.48,480 v1(1105,480)
NetR8_2: R8.2 U1.21 | length 434.8
  Top Layer w12: R8.2 865,445 885,465 v1(940,465) ; v1(1070,450) 1120.96,450 1172.06,398.9 U1.21
  Bottom Layer w12: v1(940,465) 1051.48,465 1066.48,450 v1(1070,450)
NetR9_2: R9.2 U1.22 | length 611.6
  Top Layer w12: R9.2 675,450 718,407 867,407 895,435 v1(915,435) ; v1(1105,415) 1140.79,379.21 U1.22
  Bottom Layer w12: v1(915,435) 1000,435 1020,415 v1(1105,415)
NetT1_RXD: T1.RXD U1.57 | length 2251.5
  Top Layer w12: T1.RXD 620,1290 600,1270 600,890 555,845 555,577.03 587.03,545 935,545 1035,445 1035,275 v1(1033.05,273.05) ; v1(1595,340) 1595.08,339.92 1661.3,339.92 U1.57
  Bottom Layer w12: v1(1033.05,273.05) 1126.11,180 1290,180 1450,340 v1(1595,340)
NetT1_TXD: T1.TXD U1.58 | length 2372.5
  Top Layer w12: T1.TXD 625,1390 580,1345 580,895.46 537,852.46 537,568 578,527 923,527 1015,435 1015,328.52 1000,313.52 v1(1000,306.5) ; v1(1535,370) 1603.89,370 1614.36,359.53 U1.58
  Bottom Layer w12: v1(1000,306.5) 1038.5,306.5 1145,200 1280,200 1440,360 1525,360 v1(1535,370)
NetT2_RXD: T2.RXD U1.61 | length 1535.3
  Top Layer w12: T2.RXD 607.03,785 600,777.97 600,592.03 607.03,585 v1(1125,585) ; U1.61 1715.06,418.58 v1(1721.5,425)
  Bottom Layer w12: v1(1125,585) 1565,585 1721.5,428.5 v1(1721.5,425)
NetT2_TXD: T2.TXD U1.62 | length 1553.6
  Top Layer w12: T2.TXD 625,885 575,835 575,590 600,565 1080,565 v1(1095,550) ; v1(1580,425) 1583.52,425 1596.79,438.27 U1.62
  Bottom Layer w12: v1(1095,550) 1475,550 1580,445 v1(1580,425)
pads on no net: K1. K1.A8 K1.B8 K2. K2.3 K3. K3.3 SP1.1 SP1.2 SP1.3 T1. T2. U1.2 U1.8 U1.9 U1.10 U1.11 U1.14 U1.15 U1.16 U1.17 U1.26 U1.27 U1.28 U1.29 U1.30 U1.33 U1.43 U1.50 U1.54 U1.55 U1.56 U1.59 U2.
copper on no net: | length 0.1
  Top Layer w12: 1287.27,103.53 1287.36,103.62

## Polygon pours and split planes (outlines as drawn)
GND on Top Layer "NONET_L-01_P-001" (solid, pour order 1): 285,1545 2615,1545 2615,0 1885,0 1675,-210 925,-210 715,0 285,0
no net on Top Layer "NONET_L01_P000" (solid, pour order 0): 765,1060
GND on Bottom Layer "NONET_L-01_P-001" (solid, pour order 2): 285,1545 285,0 715,0 925,-210 1675,-210 1885,0 2615,0 2615,1545

## Other copper
Multi-Layer:
  pour cut-out: 2350,760 2615,760 2615,695 2350,695
  pour cut-out: 2615,1100 2350,1100 2350,1035 2615,1035

## Silkscreen, mask and mechanical layers (free items; w line width, h text height)
Mechanical 1:
  the board outline again, w5

## Text inside footprints (layer, text, board x,y; h text height)
FB1: Mechanical 6 "Land Pattern Adapted for Reflow Soldering" at 1859.37,381.38 h1.97 r180